# Altium PCB ESP32-C3_ETH01.PcbDoc (part 1 of 2)
Units mm, origin at the board's own origin, x right, y up, seen from the top; angles counter-clockwise.
Board outline 55 x 26 mm, 2 copper layers (Top Layer, Bottom Layer); 54 components, 52 nets, 217 pads, 131 vias.
Unrouted connection lines stored in the file: 1.
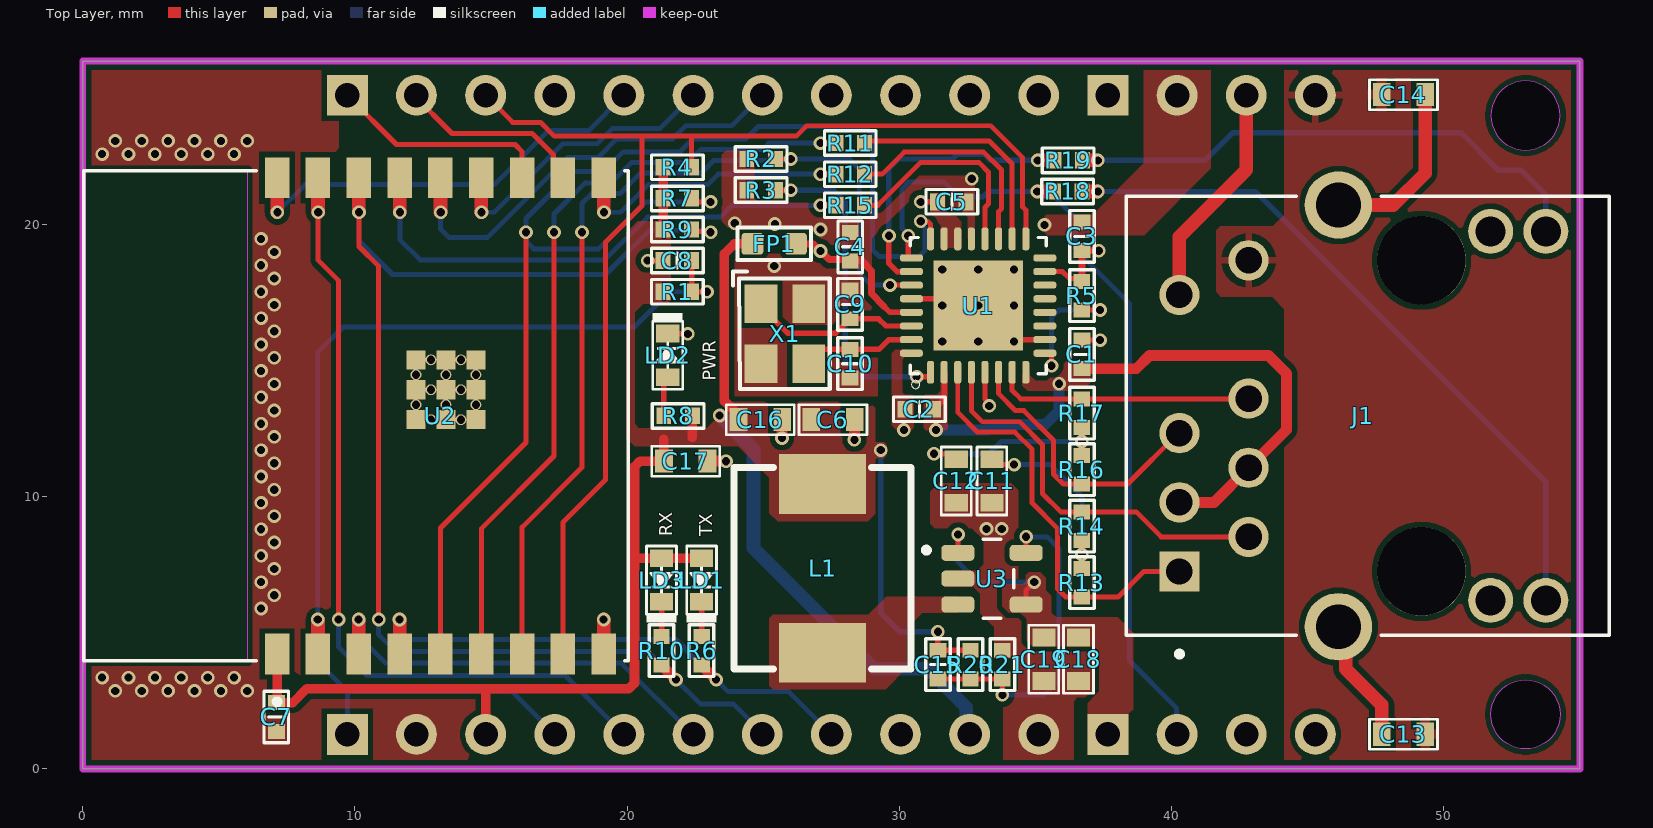
[diagram p0: Top Layer view]
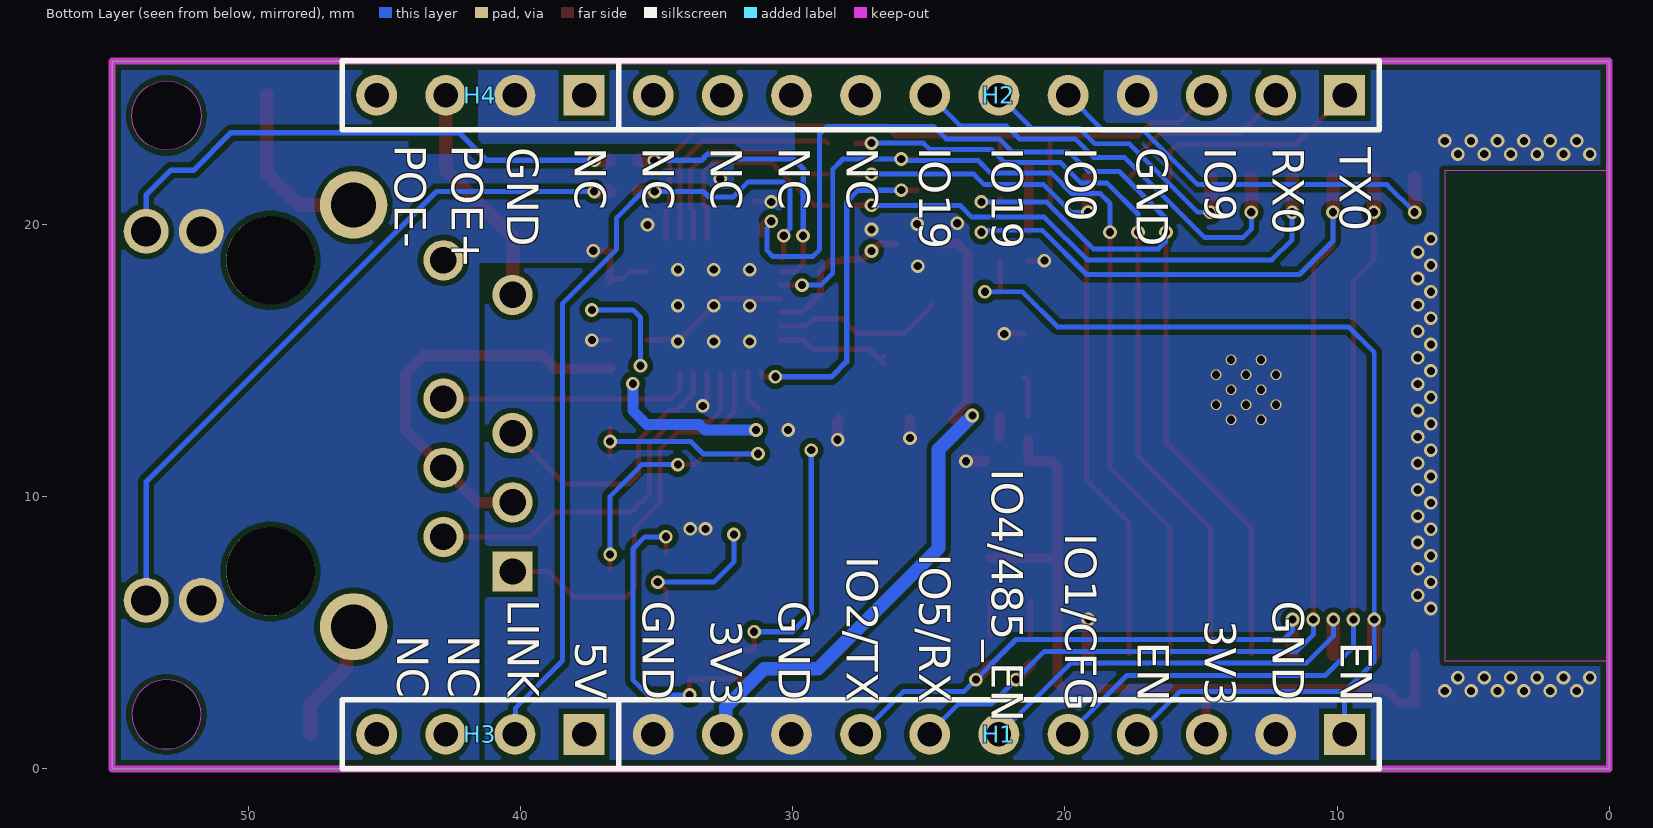
[diagram p1: Bottom Layer view, seen from below]
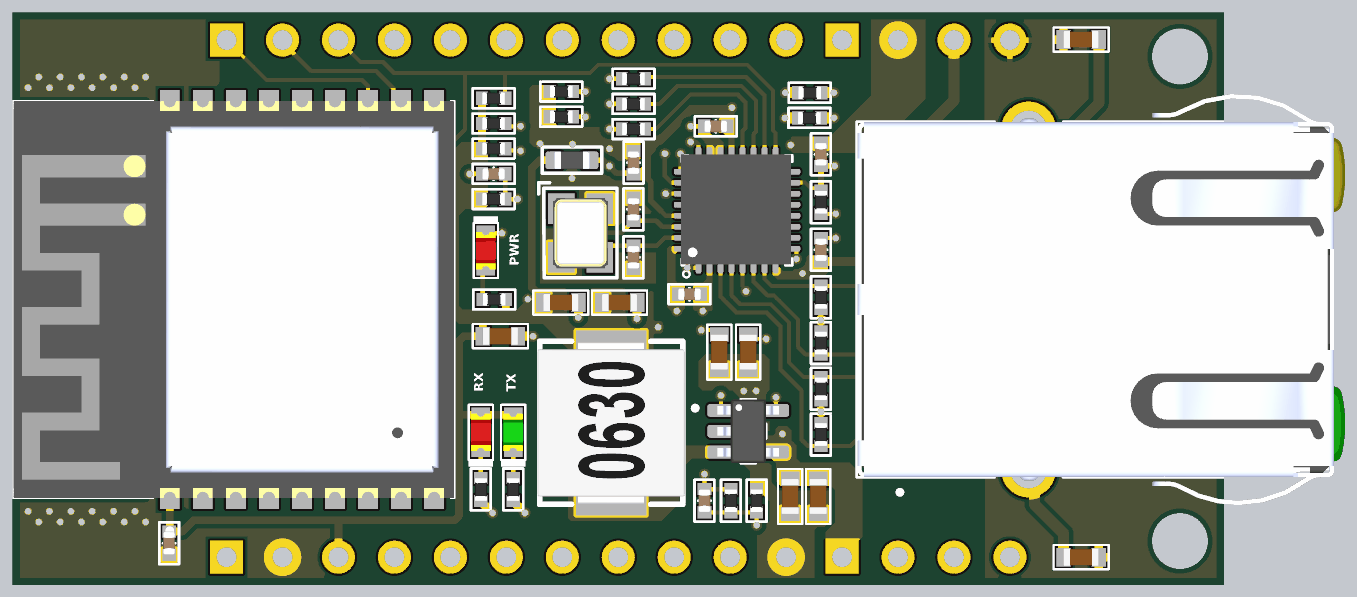
[diagram p2: 3D render of the assembled board from above, using the file's embedded part models]

## Layer stack, top to bottom
Top Solder: solder mask 0.0102, Solder Resist, Dk 3.5
Top Layer: signal copper 0.0356
Dielectric 1: dielectric 0.32, FR-4, Dk 4.8
Bottom Layer: signal copper 0.0356
Bottom Solder: solder mask 0.0102, Solder Resist, Dk 3.5

## Board outline
0,0 0,26 55,26 55,0
cut-out: 51.73,24 ccw(c53,24) 53,22.73 ccw(c53,24) 54.27,24 ccw(c53,24) 53,25.27 ccw(c53,24)
cut-out: 51.73,2 cw(c53,2) 53,3.27 cw(c53,2) 54.27,2 cw(c53,2) 53,0.73 cw(c53,2)

## Design rules (kind name [scope] priority, off if disabled: settings)
Clearance [All] p1: gap=0.2 ignorepadtopadclearanceinfootprint=FALSE
PolygonConnect PWR [InNetClass('PWR')] p1: connectstyle=Direct reliefconductorwidth=0.254 reliefentries=4 polygonreliefangle="90 Angle" airgapwidth=0.254
PolygonConnect [All] p2: thpad.connectstyle=Relief thpad.reliefconductorwidth=0.254 thpad.reliefentries=4 thpad.polygonreliefangle="90 Angle" thpad.airgapwidth=0.254 smdpad.connectstyle=Relief smdpad.reliefconductorwidth=0.381 smdpad.reliefentries=4 smdpad.polygonreliefangle="90 Angle" smdpad.airgapwidth=0.18 via.connectstyle=Direct via.reliefconductorwidth=0.254 via.reliefentries=4 via.polygonreliefangle="90 Angle" via.airgapwidth=0.254
RoutingVias [All] p1: holewidth=0.711 width=1.27 viastyle="Through Hole" minholewidth=0.711 minwidth=1.27 maxholewidth=0.711 maxwidth=1.27
SolderMaskExpansion [All] p1: expansion=0.102 istentingtop=FALSE
Width [All] p1: maxlimit=1 minlimit=0.18 preferedwidth=0.254
30 further rules are at their usual default settings.

## Classes and differential pairs
net class PWR: 1.8V +3V3 +5 ETH_PWR GND NetL1_1

## Components (designator, comment, footprint, x,y, rotation, side; value= is the part's Value field where it differs from the comment)
C1 "0.1uF 100V" CAP0402 36.703,15.223 r180 top
C2 "0.1uF 100V" CAP0402 30.734,13.208 r270 top
C3 "0.1uF 100V" CAP0402 36.703,19.558 r180 top
C4 "0.1uF 100V" CAP0402 28.194,19.177 r180 top
C5 "0.1uF 100V" CAP0402 31.928,20.828 r270 top
C6 "22uF-0603" CAP0603 27.559,12.827 r0 top value=10uF
C7 "0.1uF 04020" CAP0402 7.112,1.905 r0 top
C8 "1uF 0402" CAP0402 21.844,18.669 r270 top
C9 "C0402C100K5GACTU" CAP0402 28.19,17.059 r0 top
C10 "C0402C100K5GACTU" CAP0402 28.19,14.883 r180 top
C11 "1nF-0603" CAP0603 33.397,10.574 r270 top
C12 "1nF-0603" CAP0603 32.089,10.574 r270 top
C13 "1nF-0603" CAP0603 48.514,1.27 r0 top
C14 "1nF-0603" CAP0603 48.514,24.765 r180 top
C15 "20pF 0402" CAP0402 31.414,3.831 r0 top
C16 "22uF-0603" CAP0603 24.892,12.827 r0 top value=10uF
C17 "22uF-0603" CAP0603 22.149,11.303 r0 top value=10uF
C18 "10uF-0603" CAP0603 36.576,4.026 r270 top value=10uF
C19 "10uF-0603" CAP0603 35.306,4.026 r270 top value=10uF
FP1 "120R-100M" FP0603 25.4,19.685 r270 top
H1 "Header 11" HDR1X11 9.72,1.268 r0 bottom
H2 "Header 11" HDR1X11 9.72,24.742 r0 bottom
H3 "Header 4" HDR1X4 37.66,1.268 r0 bottom
H4 "Header 4" HDR1X4 37.66,24.742 r0 bottom
J1 "1-2250024-1" BEL_1-2250024-1 49.176,12.965 r90 top
L1 "2.2uH" "Cuon cam - 06030 - 7*7*3" 27.178,7.366 r180 top
LD1 "LED-GREEN" LED_SMD0603_GREEN 22.733,6.934 r270 top
LD2 "LED-RED" LED_SMD0603_RED 21.488,15.189 r90 top
LD3 "LED-RED" LED_SMD0603_RED 21.263,6.934 r270 top
R1 "RC0402FR-1310KL" RES0402 21.844,17.526 r270 top
R2 "10K-0402 ±1%" RES0402 24.917,22.403 r90 top
R3 "RC0402JR-076K8L" RES0402 24.917,21.26 r270 top
R4 "RC0402JR-0720KL" RES0402 21.844,22.098 r270 top
R5 "RC0402FR-1310KL" RES0402 36.703,17.382 r0 top
R6 "RC0402JR-071KL" RES0402 22.733,4.343 r0 top
R7 "RC0402JR-0720KL" RES0402 21.844,20.955 r270 top
R8 "RC0402JR-071KL" RES0402 21.868,12.965 r270 top
R9 "RC0402JR-0720KL" RES0402 21.844,19.812 r270 top
R10 "RC0402JR-071KL" RES0402 21.263,4.343 r0 top
R11 "RC0402JR-0722RL" RES0402 28.194,22.987 r90 top
R12 "RC0402JR-0722RL" RES0402 28.194,21.844 r90 top
R13 "RC0402JR-0762RL" RES0402 36.703,6.837 r180 top
R14 "RC0402JR-0762RL" RES0402 36.703,8.913 r180 top
R15 "RC0402JR-0722RL" RES0402 28.194,20.701 r90 top
R16 "RC0402JR-0762RL" RES0402 36.703,10.988 r180 top
R17 "RC0402JR-0762RL" RES0402 36.703,13.064 r180 top
R18 "RC0402JR-07330RL" RES0402 36.178,21.209 r90 top
R19 "RC0402JR-07330RL" RES0402 36.195,22.352 r90 top
R20 "RC0402JR-07100KL" RES0402 32.612,3.831 r180 top
R21 "RC0402JR-0720KL" RES0402 33.782,3.831 r0 top
U1 "DM9051" QFN50P500X500X100-33N 32.893,17.018 r90 top
U2 "ESP32-C3-WROOM-02-H4" MODULE_ESP32-C3-WROOM-02-H4 10.042,12.965 r90 top locked
U3 "ETA3417" SOT95P280X145-5N 33.401,6.985 r0 top
X1 "-" OSC-SMD_4P-L3.2-W2.5-BL 25.791,15.983 r270 top

## Footprints (in the part's own frame and the unit in brackets; to place one, negate y for a bottom-side part, rotate by r counter-clockwise, add the part's x,y. Pads: shape width x height; smd on the part's side, far side on the other; paste and mask are expansions set on the pad)
BEL_1-2250024-1 [mm]
  rect 1.478x1.478 hole 0.97: 1(-5.715,8.89)
  round 1.478 hole 0.97: 2(-4.445,6.35) 3(-3.175,8.89) 4(-1.905,6.35) 5(-0.635,8.89) 6(0.635,6.35) 9(4.445,8.89) 10(5.715,6.35)
  round 1.65 hole 1.1: 11(-6.78,-2.54) 12(-6.78,-4.57) 13(6.78,-2.54) 14(6.78,-4.57)
  round 2.475 hole 1.65: S1(-7.745,3.05) S2(7.745,3.05)
  round 3.25 hole 3.25 unplated: ""(-5.715,0) ""(5.715,0)
  silkscreen extent -8.85,-6.9 8.07,10.85, body extent -9.34,-11.33 9.33,10.82, height 15.34
CAP0402 [mm]
  rect 0.62x0.55 smd: 1(0,0.525) 2(0,-0.525)
  silkscreen extent -0.45,-0.95 0.45,0.95, body extent -0.27,-0.53 0.28,0.52, height 0.55
CAP0603 [mm]
  rect 0.65x0.85 smd: 1(-0.8,0) 2(0.8,0)
  silkscreen extent -1.25,-0.55 1.25,0.55, body extent -0.8,-0.4 0.8,0.4, height 0.79
"Cuon cam - 06030 - 7*7*3" [mm]
  rect 3.2x2.2 smd: 1(0,3.1) 2(0,-3.1)
  silkscreen extent -3.25,-3.7 3.25,3.7, body extent -3.35,-3.65 3.35,3.65, height 2.81
FP0603 [mm]
  rrect30% 0.8x0.8 smd: 1(0.4,0.8) 2(0.4,-0.8)
  silkscreen extent -0.2,-1.35 0.99,1.35, body extent 0,-0.8 0.8,0.8, height 0.8
HDR1X4 [mm] "Connector; Header; 4 Position"
  rect 1.5x1.5 hole 0.9: 1(0,0)
  round 1.5 hole 0.9: 2(2.54,0) 3(5.08,0) 4(7.62,0)
  silkscreen extent -1.27,-1.27 8.89,1.27, body extent -1.27,-1.27 8.89,1.27, height 7
HDR1X11 [mm] "Connector; Header; 11 Position"
  rect 1.5x1.5 hole 0.9: 1(0,0)
  round 1.5 hole 0.9: 2(2.54,0) 3(5.08,0) 4(7.62,0) 5(10.16,0) 6(12.7,0) 7(15.24,0) 8(17.78,0) 9(20.32,0) 10(22.86,0) 11(25.4,0)
  silkscreen extent -1.27,-1.27 26.67,1.27, body extent -1.27,-1.27 26.67,1.27, height 7
LED_SMD0603_GREEN [mm]
  rect 0.65x0.85 smd: 1(-0.8,0) 2(0.8,0)
  silkscreen extent -1.25,-0.55 1.55,0.55, body extent -0.85,-0.45 0.85,0.45, height 0.9
LED_SMD0603_RED [mm]
  rect 0.65x0.85 smd: 1(-0.8,0) 2(0.8,0)
  silkscreen extent -1.25,-0.55 1.55,0.55, body extent -0.86,-0.45 0.85,0.45, height 0.9
MODULE_ESP32-C3-WROOM-02-H4 [mm]
  rect 1.5x0.9 smd: 1(-8.75,2.9) 2(-8.75,1.4) 3(-8.75,-0.1) 4(-8.75,-1.6) 5(-8.75,-3.1) 6(-8.75,-4.6) 7(-8.75,-6.1) 8(-8.75,-7.6) 9(-8.75,-9.1) 10(8.75,-9.1) 11(8.75,-7.6) 12(8.75,-6.1) 13(8.75,-4.6) 14(8.75,-3.1) 15(8.75,-1.6) 16(8.75,-0.1) 17(8.75,1.4) 18(8.75,2.9)
  rect 0.7x0.7 smd: 19(-0.14,-2.2) 20(0.96,-2.2) 21(2.06,-2.2) 22(-0.14,-3.3) 23(0.96,-3.3) 24(2.06,-3.3) 25(-0.14,-4.4) 26(0.96,-4.4) 27(2.06,-4.4)
  round 0.4 hole 0.3 mask+0: 28(0.41,-2.2) 29(1.51,-2.2) 30(-0.14,-2.75) 31(0.96,-2.75) 32(2.06,-2.75) 33(0.41,-3.3) 34(1.51,-3.3) 35(-0.14,-3.85) 36(0.96,-3.85) 37(2.06,-3.85) 38(0.41,-4.4) 39(1.51,-4.4)
  Keep-Out Layer region: 9,4 -9,4 -9,10 9,10
  Keep-Out Layer region: 9,4 -9,4 -9,10 9,10
  silkscreen extent -10.6,-10 9,10, body extent -9,-10 9,10, height 3.35
OSC-SMD_4P-L3.2-W2.5-BL [mm]
  rect 1.4x1.2 smd: 1(-1.1,-0.875) 2(1.1,-0.875) 3(1.1,0.875) 4(-1.1,0.875)
  silkscreen extent -2.29,-1.9 2.03,1.65, body extent -1.6,-1.25 1.6,1.25, height 0.8
QFN50P500X500X100-33N [mm]
  rrect70% 0.84x0.26 smd: 1(-2.45,1.75) 2(-2.45,1.25) 3(-2.45,0.75) 4(-2.45,0.25) 5(-2.45,-0.25) 6(-2.45,-0.75) 7(-2.45,-1.25) 8(-2.45,-1.75) 17(2.45,-1.75) 18(2.45,-1.25) 19(2.45,-0.75) 20(2.45,-0.25) 21(2.45,0.25) 22(2.45,0.75) 23(2.45,1.25) 24(2.45,1.75)
  rrect70% 0.26x0.84 smd: 9(-1.75,-2.45) 10(-1.25,-2.45) 11(-0.75,-2.45) 12(-0.25,-2.45) 13(0.25,-2.45) 14(0.75,-2.45) 15(1.25,-2.45) 16(1.75,-2.45) 25(1.75,2.45) 26(1.25,2.45) 27(0.75,2.45) 28(0.25,2.45) 29(-0.25,2.45) 30(-0.75,2.45) 31(-1.25,2.45) 32(-1.75,2.45)
  rect 3.3x3.3 smd paste-3: 33(0,0)
  silkscreen extent -3.05,-2.5 2.5,2.5, body extent -2.46,-2.46 2.54,2.54, height 1
RES0402 [mm]
  rect 0.6x0.55 smd: 1(0,0.525) 2(0,-0.525)
  silkscreen extent -0.45,-0.95 0.45,0.95, body extent -0.27,-0.52 0.28,0.53, height 0.4
SOT95P280X145-5N [mm]
  rrect50% 1.21x0.59 smd: 1(-1.255,0.95) 2(-1.255,0) 3(-1.255,-0.95) 4(1.255,-0.95) 5(1.255,0.95)
  silkscreen extent -2.51,-1.45 0.8,1.45, body extent -1.4,-1.45 1.4,1.45, height 1.45

## Part data
C1 C2 C3 C4 C5 C7: library part CC0402KRX7R8BB104, "Multilayer Ceramic Capacitor, 0.1 uF, 50 V, ï¿½ 10%, X7R, 0402 [1005 Metric]", Capacitance=100nF, Case Code (Imperial)=0402, Case Code (Metric)=1005, Dielectric=X7R, Manufacturer=Yageo, Max Operating Temperature=125°C, Min Operating Temperature=-55°C, Temperature Coefficient=30ppm/°C, Tolerance=10%, Voltage Rating=25V, Case/Package=0402, Category="Ceramic Capacitors", Construction=Flat, Dissipation Factor=3.5%, Halogen Free=5694HalogenFree, Height=0.5mm, Lead Free=5697LeadFree, Length=1mm, Manufacturer Part Number=CC0402KRX7R8BB104, Material=4241ConductorMaterial, Mount="Surface Mount", Packaging="Tape and Reel", Pricing 1="10000=0.0031, 40000=0.003, 150000=0.0028, 300000=0.0027, 400000=0.0027, 750000=0.0026, 1000000=0.0026 (USD)", RoHS=Yes, RoHS Compliant=Yes, Series=CC, Stock 1=28110000, Supplier 1="Future Electronics", Termination=SMD/SMT, Thickness=0.022inch, Voltage Rating (DC)=25V, Width=0.02inch
C6 C16 C17: library part CC0603KRX5R6BB106, "CAP CER 22UF 10V X5R 0603", Capacitance=10µF, Manufacturer 1=Yageo, Operating Temperature="-55°C ~ 85°C", Package / Case="0603 (1608 Metric)", Ratings=-, Supplier Part Number 1=311-1782-1-ND, Temperature Coefficient=X5R, Tolerance=±10%, Voltage - Rated=10V, Applications="General Purpose", Category 1=Capacitors, ComponentLink1Description=http://www.yageo.com/documents/recent/UPY-GPHC_X5R_4V-to-50V_24.pdf, ComponentLink1URL=http://www.yageo.com/documents/recent/UPY-GPHC_X5R_4V-to-50V_24.pdf, Description 1="CAP CER 10UF 10V X5R 0603", Failure Rate=-, Features=-, Height - Seated (Max)=-, Lead Spacing=-, Lead Style=-, Manufacturer Part Number 1=CC0603KRX5R6BB106, Mounting Type="Surface Mount, MLCC", Packaging="Cut Tape (CT)", Part Status=Active, Pricing 1="1=0.33, 10=0.225, 100=0.1272, 500=0.08982, 1000=0.07858 (USD)", RoHS 1="RoHS Compliant", Size / Dimension="0.063\" L x 0.031\" W (1.60mm x 0.80mm)", Stock 1=66566, Supplier 1=Digi-Key, Thickness (Max)="0.035\" (0.90mm)"
C8: library part CC0402KRX5R5BB105, "Multilayer Ceramic Capacitor, 1 uF, 100 V, ï¿½ 10%, X7R, 0402 [1005 Metric]", Capacitance=1uF, Case Code (Imperial)=0402, Case Code (Metric)=1005, Dielectric=X5R, Dielectric Material=4241ConductorMaterial, Manufacturer=Yageo, Max Operating Temperature=85°C, Min Operating Temperature=-55°C, Temperature Coefficient=30ppm/°C, Tolerance=10%, Voltage Rating=6.3V, Case/Package=0402, Category="Ceramic Capacitors", Depth=0.5mm, Halogen Free=5694HalogenFree, Height=0.5mm, Lead Free=5697LeadFree, Length=1mm, Manufacturer Part Number=CC0402KRX5R5BB105, Material=4241ConductorMaterial, Mount="Surface Mount", Number of Pins=2, Packaging="Tape and Reel", Pricing 1="10000=0.0079, 30000=0.0077, 50000=0.0076, 150000=0.0074, 250000=0.0072 (USD)", Radiation Hardening=No, Reach SVHC Compliant=No, RoHS=Yes, RoHS Compliant=Yes, Series=CC, Stock 1=12090000, Supplier 1="Future Electronics", Termination=SMD/SMT, Voltage Rating (AC)=6.3V, Voltage Rating (DC)=6.3V, Width=0.5mm
C9 C10: "Multilayer Ceramic Capacitor, 10 pF, 50 V, ï¿½ 10%, C0G (NP0), 0402 [1005 Metric]", Capacitance=10pF, Case Code (Imperial)=0402, Case Code (Metric)=1005, Dielectric=C0G, Dielectric Material=4241ConductorMaterial, Manufacturer=KEMET, Max Operating Temperature=125°C, Min Operating Temperature=-55°C, Package Quantity=1, Tolerance=10%, Voltage Rating=50V, Case/Package=0402, Category="Ceramic Capacitors", Construction=Flat, Depth=0.5mm, Dissipation Factor=0.1%, Height=0.5mm, Lead Free=5697LeadFree, Lead Pitch=0.3mm, Length=1mm, Manufacturer Part Number=C0402C100K5GACTU, Material=4241ConductorMaterial, Mount="Surface Mount", Number of Pins=2NUMBER, Packaging="Tape and Reel", Pricing 1="1=0.1, 10=0.008, 50=0.008, 100=0.005, 1000=0.004, 10000=0.003 (USD)", Radiation Hardening=No, Reach SVHC Compliant=No, RoHS=Yes, RoHS Compliant=Yes, Series=C, Stock 1=56137, Supplier 1=Mouser, Termination=SMD/SMT, Thickness=0.022inch, Voltage Rating (DC)=50V, Width=0.02inch
C11 C12 C13 C14: library part CC0603KRX7R9BB102, "CAP CER 1000PF 50V X7R 0603", Manufacturer=Yageo, Operating Temperature="-55°C ~ 125°C", Package / Case="0603 (1608 Metric)", Ratings=-, Supplier Part Number 1=311-1080-1-ND, Temperature Coefficient=X7R, Tolerance=±10%, Voltage - Rated=50V, Applications="General Purpose", Category=Capacitors, ComponentLink1Description=http://www.yageo.com/documents/recent/UPY-GPHC_X7R_6.3V-to-50V_18.pdf, ComponentLink1URL=http://www.yageo.com/documents/recent/UPY-GPHC_X7R_6.3V-to-50V_18.pdf, Failure Rate=-, Features=-, Height - Seated (Max)=-, Lead Spacing=-, Lead Style=-, Manufacturer Part Number=CC0603KRX7R9BB102, Mounting Type="Surface Mount, MLCC", Notification="Current market demand for these product types have resulted in fluctuating and extending lead times. Lead times may differ.", Packaging="Cut Tape (CT)", Part Status=Active, Pricing 1="1=0.1, 10=0.028, 100=0.0126, 500=0.009, 1000=0.00708 (USD)", RoHS="RoHS Compliant", Size / Dimension="0.063\" L x 0.032\" W (1.60mm x 0.80mm)", Stock 1=0, Supplier 1=Digi-Key, Thickness (Max)="0.035\" (0.90mm)"
C15: library part C0402C100K5GACTU, "Multilayer Ceramic Capacitor, 10 pF, 50 V, ï¿½ 10%, C0G (NP0), 0402 [1005 Metric]", Capacitance=10pF, Case Code (Imperial)=0402, Case Code (Metric)=1005, Dielectric=C0G, Dielectric Material=4241ConductorMaterial, Manufacturer=KEMET, Max Operating Temperature=125°C, Min Operating Temperature=-55°C, Package Quantity=1, Tolerance=10%, Voltage Rating=50V, Case/Package=0402, Category="Ceramic Capacitors", Construction=Flat, Depth=0.5mm, Dissipation Factor=0.1%, Height=0.5mm, Lead Free=5697LeadFree, Lead Pitch=0.3mm, Length=1mm, Manufacturer Part Number=C0402C100K5GACTU, Material=4241ConductorMaterial, Mount="Surface Mount", Number of Pins=2NUMBER, Packaging="Tape and Reel", Pricing 1="1=0.1, 10=0.008, 50=0.008, 100=0.005, 1000=0.004, 10000=0.003 (USD)", Radiation Hardening=No, Reach SVHC Compliant=No, RoHS=Yes, RoHS Compliant=Yes, Series=C, Stock 1=56137, Supplier 1=Mouser, Termination=SMD/SMT, Thickness=0.022inch, Voltage Rating (DC)=50V, Width=0.02inch
C18 C19: library part CC0603KRX5R6BB106, "CAP CER 10UF 10V X5R 0603", Capacitance=10µF, Manufacturer 1=Yageo, Operating Temperature="-55°C ~ 85°C", Package / Case="0603 (1608 Metric)", Ratings=-, Supplier Part Number 1=311-1782-1-ND, Temperature Coefficient=X5R, Tolerance=±10%, Voltage - Rated=10V, Applications="General Purpose", Category 1=Capacitors, ComponentLink1Description=http://www.yageo.com/documents/recent/UPY-GPHC_X5R_4V-to-50V_24.pdf, ComponentLink1URL=http://www.yageo.com/documents/recent/UPY-GPHC_X5R_4V-to-50V_24.pdf, Description 1="CAP CER 10UF 10V X5R 0603", Failure Rate=-, Features=-, Height - Seated (Max)=-, Lead Spacing=-, Lead Style=-, Manufacturer Part Number 1=CC0603KRX5R6BB106, Mounting Type="Surface Mount, MLCC", Packaging="Cut Tape (CT)", Part Status=Active, Pricing 1="1=0.33, 10=0.225, 100=0.1272, 500=0.08982, 1000=0.07858 (USD)", RoHS 1="RoHS Compliant", Size / Dimension="0.063\" L x 0.031\" W (1.60mm x 0.80mm)", Stock 1=66566, Supplier 1=Digi-Key, Thickness (Max)="0.035\" (0.90mm)"
FP1: library part "FERRITE BREAD", "MAF1608FAD121CT000", ComponentLink1Description=https://www.mouser.vn/ProductDetail/TDK/MAF1608FAD121CT000?qs=s6nfgz3miVyig30k%2FQ1Tzw%3D%3D
J1: "1 Port RJ45 Magjack Connector Through Hole 10/100 Base-T, AutoMDIX, Power over Ethernet (PoE)", Package=None, Availability=Warning, DigiKey-Purchase-URL=https://snapeda.com/shop?store=DigiKey&id=3605456, MF="TRP Connector", Mouser-Purchase-URL=https://snapeda.com/shop?store=Mouser&id=3605456, MP=1-2250024-1, Price=None, SnapEDA_Link=https://www.snapeda.com/parts/1-2250024-1/TRP%20Connector%20B.V./view-part/3605456/?ref=snap
L1: library part "Fixed Inductors", "Wire-wound SMD Inductor 0630-2R2 2.2uH 7A", Package=Package, Check_prices=https://www.snapeda.com/parts/ASPI-0425-1R0N-T3%20(3K/REEL)/Abracon+LLC/view-part/?ref=eda, MF="Abracon LLC", MP="ASPI-0425-1R0N-T3 (3K/REEL)", SnapEDA_Link=https://www.snapeda.com/parts/ASPI-0425-1R0N-T3%20(3K/REEL)/Abracon+LLC/view-part/?ref=snap
LD1: library part LED_LTST-C191KGKT, "LED GREEN CLEAR 0603 SMD", Color=Green, Current - Test=20mA, Lens Color=Colorless, Manufacturer 1="Lite-On Inc.", Manufacturer Part Number 1=LTST-C191KGKT, Millicandela Rating=35mcd, Package / Case="0603 (1608 Metric)", Supplier Part Number 1=160-1446-1-ND, Voltage - Forward (Vf) (Typ)=2V, Category 1=Optoelectronics, ComponentLink1Description=http://optoelectronics.liteon.com/upload/download/DS22-2000-228/S_110_LTST-C191KGKT.pdf, ComponentLink1URL=http://optoelectronics.liteon.com/upload/download/DS22-2000-228/S_110_LTST-C191KGKT.pdf, Description 1="LED GREEN CLEAR 0603 SMD", Features=-, Height (Max)=0.55mm, Lens Style/Size="Rectangle with Flat Top, 1.10mm x 0.80mm", Lens Transparency=Clear, Mounting Type="Surface Mount", Packaging="Cut Tape (CT)", Part Status=Active, Pricing 1="1=0.29, 10=0.211, 25=0.1556, 100=0.1111, 250=0.07556, 500=0.06666, 1000=0.05222, 2500=0.05111 (USD)", RoHS 1="RoHS Compliant", Size / Dimension="1.60mm L x 0.80mm W", Stock 1=1325167, Supplier 1=Digi-Key, Viewing Angle=130°, Wavelength - Dominant=571nm, Wavelength - Peak=574nm
LD2 LD3: library part LED_LTST-C191KRKT, "LED RED CLEAR 0603 SMD", Color=Red, Current - Test=20mA, Lens Color=Colorless, Manufacturer="Lite-On Inc.", Manufacturer Part Number=LTST-C191KRKT, Millicandela Rating=54mcd, Package / Case="0603 (1608 Metric)", Supplier Part Number 1=160-1447-6-ND, Voltage - Forward (Vf) (Typ)=2V, Category=Optoelectronics, ComponentLink1Description=http://optoelectronics.liteon.com/upload/download/DS22-2000-223/LTST-C191KRKT.PDF, ComponentLink1URL=http://optoelectronics.liteon.com/upload/download/DS22-2000-223/LTST-C191KRKT.PDF, Features=-, Height (Max)=0.65mm, Lens Style/Size="Rectangle with Flat Top, 1.10mm x 0.80mm", Lens Transparency=Clear, Mounting Type="Surface Mount", Packaging=Digi-Reel®, Part Status=Active, Pricing 1="1=0.29, 10=0.211, 25=0.1556, 100=0.1111, 250=0.07556, 500=0.06666, 1000=0.05222, 2500=0.05111 (USD)", RoHS="RoHS Compliant", Size / Dimension="1.60mm L x 0.80mm W", Stock 1=711347, Supplier 1=Digi-Key, Viewing Angle=130°, Wavelength - Dominant=631nm, Wavelength - Peak=639nm
R1 R5: "SMD Chip Resistor, 10 kOhm, ï¿½ 1%, 63 mW, 0402 [1005 Metric], Thick Film, General Purpose", Case Code (Imperial)=0402, Case Code (Metric)=1005, Manufacturer=Yageo, Max Operating Temperature=155°C, Min Operating Temperature=-55°C, Power Rating=62.5mW, Resistance=10kR, Resistance Tolerance=1%, Resistor Type="Thick Film", Supplier Part Number 1=2023432, Temperature Coefficient=100ppm/°C, Voltage Rating=50V, Case/Package=0402, Category="Chip SMD Resistors", Construction=Rectangular, Contact Plating=Tin,Lead, Depth=0.5mm, Lead Free=5697LeadFree, Length=1mm, Manufacturer Part Number=RC0402FR-1310KL, Military Standard=Not, Number of Pins=2NUMBER, Number of Terminations=2, Packaging="Tape and Reel", Pricing 1="50000=0.0008, 200000=0.0007, 500000=0.0007, 750000=0.0007, 1250000=0.0007, 2000000=0.0007, 5000000=0.0006 (USD)", Reach SVHC Compliant=No, RoHS=Yes, RoHS Compliant=Yes, Series=RC, Stock 1=4200000, Supplier 1="Future Electronics", Technology="THICK FILM", Termination=SMD/SMT, Tolerance=1%, Voltage Rating (DC)=50V, Working Voltage=50V
R2: library part RC0402FR-1310KL, "SMD Chip Resistor, 10 kOhm, ï¿½ 1%, 63 mW, 0402 [1005 Metric], Thick Film, General Purpose", Case Code (Imperial)=0402, Case Code (Metric)=1005, Manufacturer=Yageo, Max Operating Temperature=155°C, Min Operating Temperature=-55°C, Power Rating=62.5mW, Resistance=10kR, Resistance Tolerance=1%, Resistor Type="Thick Film", Supplier Part Number 1=2023432, Temperature Coefficient=100ppm/°C, Voltage Rating=50V, Case/Package=0402, Category="Chip SMD Resistors", Construction=Rectangular, Contact Plating=Tin,Lead, Depth=0.5mm, Lead Free=5697LeadFree, Length=1mm, Manufacturer Part Number=RC0402FR-1310KL, Military Standard=Not, Number of Pins=2NUMBER, Number of Terminations=2, Packaging="Tape and Reel", Pricing 1="50000=0.0008, 200000=0.0007, 500000=0.0007, 750000=0.0007, 1250000=0.0007, 2000000=0.0007, 5000000=0.0006 (USD)", Reach SVHC Compliant=No, RoHS=Yes, RoHS Compliant=Yes, Series=RC, Stock 1=4200000, Supplier 1="Future Electronics", Technology="THICK FILM", Termination=SMD/SMT, Tolerance=1%, Voltage Rating (DC)=50V, Working Voltage=50V
R3: "Res Thick Film 0402 6.8K Ohm 5% 0.063W(1/16W) ±100ppm/C Pad SMD T/R", Manufacturer=Yageo, Category="Chip SMD Resistors", ComponentLink1Description=https://datasheet.ciiva.com/22643/1018594-22643413.pdf?src-supplier=Element14, ComponentLink1URL=https://datasheet.ciiva.com/22643/1018594-22643413.pdf?src-supplier=Element14, ComponentLink2Description=https://datasheet.ciiva.com/6067/1018594-6067880.pdf?src-supplier=Farnell, ComponentLink2URL=https://datasheet.ciiva.com/6067/1018594-6067880.pdf?src-supplier=Farnell, ComponentLink3Description=https://datasheet.ciiva.com/2452/pyu-r-int-thick-7-2452782.pdf?src-supplier=Digikey, ComponentLink3URL=https://datasheet.ciiva.com/2452/pyu-r-int-thick-7-2452782.pdf?src-supplier=Digikey, ComponentLink4Description=https://datasheet.ciiva.com/2452/pyu-r-int-thick-7-2452783.pdf?src-supplier=Digikey, ComponentLink4URL=https://datasheet.ciiva.com/2452/pyu-r-int-thick-7-2452783.pdf?src-supplier=Digikey, ComponentLink5Description=https://datasheet.ciiva.com/2452/pyu-r-int-thick-7-2452784.pdf?src-supplier=Digikey, ComponentLink5URL=https://datasheet.ciiva.com/2452/pyu-r-int-thick-7-2452784.pdf?src-supplier=Digikey, ComponentLink6Description=https://datasheet.ciiva.com/15189/getdatasheetpartid-326392-15189579.pdf?src-supplier=Verical, ComponentLink6URL=https://datasheet.ciiva.com/15189/getdatasheetpartid-326392-15189579.pdf?src-supplier=Verical, Manufacturer Part Number=RC0402JR-076K8L, Pricing 1="10000=0.0012, 100000=0.0012, 300000=0.0011, 750000=0.0011, 2000000=0.001 (USD)", RoHS=Yes, Stock 1=40000, Supplier 1="Future Electronics"
R4 R7 R9 R21: "SMD Chip Resistor, 20 kOhm, ± 5%, 63 mW, 0402 [1005 Metric], Thick Film, General Purpose", Manufacturer=Yageo, Voltage Rating (DC)=50V, Category="Chip SMD Resistors", ComponentLink1Description=https://datasheet.ciiva.com/2518/pyu-r-int-thick-7-2518910.pdf?src-supplier=Digikey, ComponentLink1URL=https://datasheet.ciiva.com/2518/pyu-r-int-thick-7-2518910.pdf?src-supplier=Digikey, ComponentLink2Description=https://datasheet.ciiva.com/2518/pyu-r-int-thick-7-2518911.pdf?src-supplier=Digikey, ComponentLink2URL=https://datasheet.ciiva.com/2518/pyu-r-int-thick-7-2518911.pdf?src-supplier=Digikey, ComponentLink3Description=https://datasheet.ciiva.com/2518/pyu-r-int-thick-7-2518912.pdf?src-supplier=Digikey, ComponentLink3URL=https://datasheet.ciiva.com/2518/pyu-r-int-thick-7-2518912.pdf?src-supplier=Digikey, ComponentLink4Description=https://datasheet.ciiva.com/16742/pyu-rc0402-51-rohs-l-6-r-16742238.pdf?src-supplier=Future+Electronics, ComponentLink4URL=https://datasheet.ciiva.com/16742/pyu-rc0402-51-rohs-l-6-r-16742238.pdf?src-supplier=Future+Electronics, ComponentLink5Description=https://datasheet.ciiva.com/12656/pyu-rc0402-51-rohs-l-6-r-12656781.pdf?src-supplier=Mouser, ComponentLink5URL=https://datasheet.ciiva.com/12656/pyu-rc0402-51-rohs-l-6-r-12656781.pdf?src-supplier=Mouser, ComponentLink6Description=https://datasheet.ciiva.com/7983/1018594-7983564.pdf?src-supplier=Element14, ComponentLink6URL=https://datasheet.ciiva.com/7983/1018594-7983564.pdf?src-supplier=Element14, Lead Free=5697LeadFree, Manufacturer Part Number=RC0402JR-0720KL, Number of Pins=2NUMBER, Pricing 1="10000=0.0008, 100000=0.0007, 300000=0.0007, 750000=0.0007, 2000000=0.0006 (USD)", RoHS=Yes, Stock 1=510000, Supplier 1="Future Electronics"
R6 R8 R10: "SMD Chip Resistor, 1 kOhm, ± 5%, 63 mW, 0402 [1005 Metric], Thick Film, General Purpose", Case Code (Imperial)=0402, Case Code (Metric)=1005, Manufacturer=Yageo, Max Operating Temperature=155°C, Max Power Dissipation=63mW, Min Operating Temperature=-55°C, Package Quantity=1, Power Rating=62.5mW, Resistance=1kR, Resistance Tolerance=5%, Resistor Type="Thick Film", Temperature Coefficient=100ppm/°C, Voltage Rating=50V, Case/Package=0402, Category="Chip SMD Resistors", Features="Moisture Resistant", Height=0.016inch, Lead Free=5697LeadFree, Length=0.039inch, Manufacturer Part Number=RC0402JR-071KL, Number of Terminations=2, Packaging="Cut Tape", Pricing 1="10000=0.0012, 100000=0.0012, 300000=0.0011, 750000=0.0011, 2000000=0.001 (USD)", Reach SVHC Compliant=No, RoHS=Yes, RoHS Compliant=Yes, Series=RC, Size Code=0402, Stock 1=12410000, Supplier 1="Future Electronics", Termination=SMD/SMT, Tolerance=5%, Voltage Rating (AC)=50V, Width=0.02inch
R11 R12 R15: "SMD Chip Resistor, 22 Ohm, ï¿½ 5%, 63 mW, 0402 [1005 Metric], Thick Film, General Purpose", Manufacturer=Yageo, Voltage Rating (AC)=50V, Category="Chip SMD Resistors", ComponentLink1Description=https://datasheet.ciiva.com/12656/pyu-rc0402-51-rohs-l-6-r-12656926.pdf?src-supplier=Mouser, ComponentLink1URL=https://datasheet.ciiva.com/12656/pyu-rc0402-51-rohs-l-6-r-12656926.pdf?src-supplier=Mouser, ComponentLink2Description=https://datasheet.ciiva.com/46394/1018594-46394972.pdf?src-supplier=Element14, ComponentLink2URL=https://datasheet.ciiva.com/46394/1018594-46394972.pdf?src-supplier=Element14, ComponentLink3Description=https://datasheet.ciiva.com/7850/1018594-7850181.pdf?src-supplier=Element14, ComponentLink3URL=https://datasheet.ciiva.com/7850/1018594-7850181.pdf?src-supplier=Element14, ComponentLink4Description=https://datasheet.ciiva.com/2452/pyu-r-int-thick-7-2452770.pdf?src-supplier=Digikey, ComponentLink4URL=https://datasheet.ciiva.com/2452/pyu-r-int-thick-7-2452770.pdf?src-supplier=Digikey, ComponentLink5Description=https://datasheet.ciiva.com/2452/pyu-r-int-thick-7-2452771.pdf?src-supplier=Digikey, ComponentLink5URL=https://datasheet.ciiva.com/2452/pyu-r-int-thick-7-2452771.pdf?src-supplier=Digikey, ComponentLink6Description=https://datasheet.ciiva.com/2452/pyu-r-int-thick-7-2452772.pdf?src-supplier=Digikey, ComponentLink6URL=https://datasheet.ciiva.com/2452/pyu-r-int-thick-7-2452772.pdf?src-supplier=Digikey, Manufacturer Part Number=RC0402JR-0722RL, Pricing 1="10000=0.0015, 100000=0.0015, 300000=0.0014, 750000=0.0014, 2000000=0.0013 (USD)", RoHS=Yes, Stock 1=1770000, Supplier 1="Future Electronics"
R13 R14 R16 R17: "Res Thick Film 0402 62 Ohm 5% 1/16W ±100ppm/°C Molded SMD SMD Paper T/R", Manufacturer=Yageo, Category="Chip SMD Resistors", ComponentLink1Description=https://datasheet.ciiva.com/8888/pyu-rc0402-51-rohs-l-6-8888567.pdf?src-supplier=Avnet, ComponentLink1URL=https://datasheet.ciiva.com/8888/pyu-rc0402-51-rohs-l-6-8888567.pdf?src-supplier=Avnet, ComponentLink2Description=https://datasheet.ciiva.com/17071/pyu-rc0402-51-rohs-l-6-r-17071318.pdf?src-supplier=Future+Electronics, ComponentLink2URL=https://datasheet.ciiva.com/17071/pyu-rc0402-51-rohs-l-6-r-17071318.pdf?src-supplier=Future+Electronics, ComponentLink3Description=https://datasheet.ciiva.com/5561/pyu-rc0402-51-rohs-l-6-r-8721-5561853.pdf?src-supplier=Mouser, ComponentLink3URL=https://datasheet.ciiva.com/5561/pyu-rc0402-51-rohs-l-6-r-8721-5561853.pdf?src-supplier=Mouser, Manufacturer Part Number=RC0402JR-0762RL, Pricing 1="10000=0.001, 150000=0.0009, 400000=0.0009, 1000000=0.0009, 2500000=0.0008 (USD)", RoHS=Yes, Stock 1=90000, Supplier 1="Future Electronics"
R18 R19: "SMD Chip Resistor, 330 Ohm, ± 5%, 62.5 mW, 0402 [1005 Metric], Thick Film, General Purpose", Manufacturer=Yageo, Voltage Rating (AC)=50V, Category="Chip SMD Resistors", ComponentLink1Description=https://datasheet.ciiva.com/46394/1018594-46394967.pdf?src-supplier=Element14, ComponentLink1URL=https://datasheet.ciiva.com/46394/1018594-46394967.pdf?src-supplier=Element14, ComponentLink2Description=https://datasheet.ciiva.com/7983/1018594-7983577.pdf?src-supplier=Element14, ComponentLink2URL=https://datasheet.ciiva.com/7983/1018594-7983577.pdf?src-supplier=Element14, ComponentLink3Description=https://datasheet.ciiva.com/7850/1018594-7850197.pdf?src-supplier=Element14, ComponentLink3URL=https://datasheet.ciiva.com/7850/1018594-7850197.pdf?src-supplier=Element14, ComponentLink4Description=https://datasheet.ciiva.com/2452/pyu-r-int-thick-7-2452806.pdf?src-supplier=Digikey, ComponentLink4URL=https://datasheet.ciiva.com/2452/pyu-r-int-thick-7-2452806.pdf?src-supplier=Digikey, ComponentLink5Description=https://datasheet.ciiva.com/2452/pyu-r-int-thick-7-2452807.pdf?src-supplier=Digikey, ComponentLink5URL=https://datasheet.ciiva.com/2452/pyu-r-int-thick-7-2452807.pdf?src-supplier=Digikey, ComponentLink6Description=https://datasheet.ciiva.com/2452/pyu-r-int-thick-7-2452808.pdf?src-supplier=Digikey, ComponentLink6URL=https://datasheet.ciiva.com/2452/pyu-r-int-thick-7-2452808.pdf?src-supplier=Digikey, ComponentLink7Description=https://datasheet.ciiva.com/15189/getdatasheetpartid-327801-15189565.pdf?src-supplier=Verical, ComponentLink7URL=https://datasheet.ciiva.com/15189/getdatasheetpartid-327801-15189565.pdf?src-supplier=Verical, ComponentLink8Description=https://datasheet.ciiva.com/16992/pyu-rc0402-51-rohs-l-6-r-16992152.pdf?src-supplier=Future+Electronics, ComponentLink8URL=https://datasheet.ciiva.com/16992/pyu-rc0402-51-rohs-l-6-r-16992152.pdf?src-supplier=Future+Electronics, Lead Free=5697LeadFree, Manufacturer Part Number=RC0402JR-07330RL, Pricing 1="10000=0.0008, 100000=0.0007, 300000=0.0007, 750000=0.0007, 2000000=0.0006 (USD)", RoHS=Yes, Stock 1=220000, Supplier 1="Future Electronics"
R20: "SMD Chip Resistor, 100 kOhm, ± 5%, 62.5 mW, 0402 [1005 Metric], Thick Film, General Purpose", Case Code (Imperial)=0402, Case Code (Metric)=1005, Manufacturer=Yageo, Max Operating Temperature=155°C, Max Power Dissipation=63mW, Min Operating Temperature=-55°C, Power Rating=62.5mW, Resistance=100kR, Resistance Tolerance=5%, Resistor Type="Thick Film", Temperature Coefficient=100ppm/°C, Voltage Rating=50V, Case/Package=0402, Category="Chip SMD Resistors", Construction=Rectangular, Depth=0.5mm, Features="Moisture Resistant", Lead Free=5697LeadFree, Length=1mm, Manufacturer Part Number=RC0402JR-07100KL, Military Standard=Not, Number of Terminations=2, Packaging="Tape and Reel", Pricing 1="10000=0.0008, 100000=0.0008, 400000=0.0007, 1250000=0.0007, 4000000=0.0006 (USD)", Reach SVHC Compliant=Unknown, RoHS=Yes, RoHS Compliant=Yes, Series=RC, Size Code=0402, Stock 1=250000, Supplier 1="Future Electronics", Termination=SMD/SMT, Tolerance=5%, Voltage Rating (AC)=50V
U1: "SPI to Ethernet Controller - SQFN-32", Package=None, Availability=Unavailable, MP=LAN8740AI-EN-TR, Price=None
U2: "WiFi Modules (802.11) (Engineering Samples) SMD module, ESP32-C3, 4MB SPI flash, PCB antenna, -40 C +105 C", Package=Package, Availability="In Stock", Check_prices=https://www.snapeda.com/parts/ESP32-C3-WROOM-02-H4/Espressif+Systems/view-part/?ref=eda, MF="Espressif Systems", MP=ESP32-C3-WROOM-02-H4, Price=None, Purchase-URL=https://pricing.snapeda.com/search/part/ESP32-C3-WROOM-02-H4/?ref=eda, SnapEDA_Link=https://www.snapeda.com/parts/ESP32-C3-WROOM-02-H4/Espressif+Systems/view-part/?ref=snap
U3: "2.5A Continuous, 3A Peak, 3MHz Step-Down Converter in  / SOT23-5 Package", Package=None, Availability=Unavailable, MP=LP2985AIM5-2.8/NOPB, Price=None
X1: library part SX32Y025000BA1T, JLCPCB Part Class="Extended Part", LCSC Part Name="3225 25M 10PF  10ppm  -20 -75℃", Manufacturer=TKD(泰晶), Add into BOM=yes, Convert to PCB=yes, Crystal Type=-, Datasheet=https://atta.szlcsc.com/upload/public/pdf/source/20180829/C271631_9AC1C7FBF3C0341070E3D84891BB0616.pdf, Device=SX32Y025000BA1T, External load capacitor=-, Manufacturer Part=SX32Y025000BA1T, Operating Temperature=-, Supplier=LCSC, Supplier Footprint=SMD3225-4P, Supplier Part=C271631, Symbol=SX32Y025000BA1T

## Via types
v1: diameter 0.5, hole 0.3, Top Layer to Bottom Layer, tented both sides, 131 vias

## Nets (pads, with @x,y where several pads share a name; then routed paths per layer and width w, separated by ;. In a path a pad name is that pad's centre, name@x,y a point inside that pad or via, vN(x,y) a via of type N, cw(c..) or ccw(c..) an arc to the next point about the centre after c; other vN are vias at no path point)
1.8V: C1.1 C2.1 J1.3 J1.4 U1.2 U1.8 | length 22.5
  Top Layer w0.2: C2.1 31.259,13.243 31.434,13.418 31.469,13.418 31.643,13.592 U1.2
  Top Layer w0.4: C1.1 38.701,14.698 39.192,15.189 43.561,15.189 44.221,14.529 44.221,12.456 J1.4 41.556,9.79 J1.3
  Bottom Layer w0.4: v1(31.344,12.446) 33.223,12.446 33.426,12.649 35.357,12.649 35.865,13.157 v1(35.865,14.148)
+3V3: C6.1 C7.1 C15.1 C16.1 C17.1 FP1.2 H1.3 H1.10 L1.2 LD1.1 LD3.1 R1.2 R4.2 R7.2 R8.1 R9.2 R20.2 U2.1 | length 66.8
  Top Layer w0.2: v1(31.414,5.035) C15.1 R20.2
  Top Layer w0.35: U2.1 7.142,2.46 C7.1 7.713,2.43 8.23,2.946 14.8,2.946 ; H1.3 14.8,2.946 ; R9.2 R7.2 R4.2 ; 21.349,12.103 C17.1 20.474,11.303 20.269,11.098 20.269,7.679 ; 22.393,12.182 R8.1 ; LD1.1 LD3.1 20.324,7.734 20.269,7.679 ; C16.1 23.942,12.977 23.942,13.142 23.571,13.513 23.571,18.923 23.933,19.285 FP1.2 ; 14.8,2.946 20.064,2.946 20.269,3.151 20.269,7.679
  Bottom Layer w0.2: v1(29.312,11.709) 29.312,5.74 30.017,5.035 v1(31.414,5.035)
  Bottom Layer w0.5: v1(23.393,12.979) 24.638,11.735 24.638,8.103 29.058,3.683 31.039,3.683 32.456,2.265 32.456,1.391 H1.10
+5: C18.1 C19.1 H3.1 U3.1 U3.4 | length 5.7
  Top Layer w0.18: U3.1 32.156,7.945 v1(32.156,8.611) ; U3.4 34.656,6.564 v1(34.95,6.858)
  Bottom Layer w0.18: v1(32.156,8.611) 32.156,7.595 32.893,6.858 v1(34.95,6.858)
C3_IO0: H2.5 U2.18 | length 15.8
  Top Layer w0.5: U2.18 7.142,20.452 v1(7.149,20.445)
  Bottom Layer w0.18: v1(7.149,20.445) 8.167,21.463 15.113,21.463 17.094,23.444 18.582,23.444 H2.5
C3_IO1: H1.5 U2.17 | length 29.4
  Top Layer w0.18: v1(8.649,20.445) 8.649,18.681 9.398,17.932 v1(9.398,5.486)
  Top Layer w0.5: U2.17 8.642,20.452 v1(8.649,20.445)
  Bottom Layer w0.18: v1(9.398,5.486) 9.398,4.47 10.439,3.429 17.719,3.429 H1.5
C3_IO2: H1.7 R9.1 R10.2 U2.16 | length 49.4
  Top Layer w0.18: v1(10.149,20.445) 10.149,19.188 10.871,18.466 v1(10.871,5.486) ; R9.1 22.442,19.739 23.015,19.739 v1@23.063,19.787
  Top Layer w0.4: R10.2 21.288,3.818 21.363,3.743 21.363,3.707 v1(21.793,3.277)
  Top Layer w0.5: U2.16 10.142,20.452 v1(10.149,20.445)
  Bottom Layer w0.18: v1(10.149,20.445) 10.149,19.391 11.379,18.161 19.202,18.161 20.828,19.787 v1@23.063,19.787 ; v1(10.871,5.486) 10.871,4.928 11.481,4.318 20.752,4.318 v1(21.793,3.277) 22.682,2.388 23.901,2.388 24.96,1.329 H1.7
  other v1: 23.063,19.71
C3_IO3: R15.1 U2.15 | length 19.4
  Top Layer w0.2: v1(27.102,20.701) R15.1
  Top Layer w0.5: U2.15 11.642,20.452 v1(11.649,20.445)
  Bottom Layer w0.18: v1(11.649,20.445) 11.649,19.441 12.395,18.694 19.177,18.694 20.752,20.269 23.419,20.269 23.851,20.701 v1(27.102,20.701)
C3_IO4: H1.6 U2.3 | length 15.7
  Top Layer w0.5: v1(10.135,5.486) 10.142,5.479 U2.3
  Bottom Layer w0.18: v1(10.135,5.486) 10.135,4.877 11.125,3.886 19.787,3.886 22.405,1.268 H1.6
C3_IO5: H1.8 R6.2 U2.4 | length 19.9
  Top Layer w0.4: R6.2 22.758,3.818 22.833,3.743 22.833,3.71 v1(23.266,3.277)
  Top Layer w0.5: v1(11.635,5.486) 11.642,5.479 U2.4
  Bottom Layer w0.18: v1(11.635,5.486) 11.635,5.079 11.963,4.75 21.793,4.75 23.698,2.845 25.923,2.845 H1.8
C3_IO6: R7.1 U1.24 U2.5 | length 48.6
  Top Layer w0.18: U2.5 13.142,8.849 16.281,11.989 v1(16.281,19.71) ; R7.1 22.496,20.828 v1(23.063,20.828) ; v1(30.785,20.117) 31.035,20.117 31.14,20.011 U1.24@31.14,19.609
  Bottom Layer w0.18: v1(23.063,20.828) 20.68,20.828 18.952,19.101 16.561,19.101 16.304,19.358 16.304,19.688 v1(16.281,19.71) 16.281,20.218 18.009,21.946 19.126,21.946 19.837,22.657 21.92,22.657 22.403,23.139 24.359,23.139 24.816,23.597 28.727,23.597 29.007,23.317 29.007,19.069 29.255,18.821 30.724,18.821 30.937,19.034 30.937,19.878 30.785,20.03 v1(30.785,20.117)
C3_IO7: R11.1 U2.6 | length 28.7
  Top Layer w0.18: U2.6 14.642,8.825 17.31,11.493 v1(17.31,19.71)
  Top Layer w0.2: v1(27.102,22.987) R11.1
  Bottom Layer w0.18: v1(17.31,19.71) 17.31,20.383 18.44,21.514 19.403,21.514 20.165,22.276 22.225,22.276 22.708,22.758 24.968,22.758 25.197,22.987 v1(27.102,22.987)
C3_IO8: R2.2 U1.27 U2.7 | length 35
  Top Layer w0.18: U2.7 16.142,8.877 18.339,11.074 v1(18.339,19.71) ; v1(29.655,17.768) U1.27
  Top Layer w0.2: R2.2 v1(26.009,22.403)
  Bottom Layer w0.18: v1(18.339,19.71) 18.339,20.777 18.694,21.133 19.736,21.133 20.498,21.895 22.733,21.895 23.19,22.352 25.958,22.352 v1(26.009,22.403) 28.15,22.403 28.524,22.029 28.524,18.212 28.968,17.768 v1(29.655,17.768)
C3_IO9: H2.3 R4.1 U1.17 U2.8 | length 45.4
  Top Layer w0.18: H2.3 15.793,23.749 16.815,23.749 17.323,23.241 20.543,23.241 ; U2.8 17.642,9.057 19.202,10.617 19.202,19.351 20.543,20.692 20.543,23.241 ; R4.1 22.369,23.241 ; U1.17 34.643,20.526 34.524,20.644 34.524,22.454 33.356,23.622 26.594,23.622 26.213,23.241 22.369,23.241 ; 20.543,23.241 22.369,23.241
C3_IO10: R12.1 U2.10 | length 10.4
  Top Layer w0.2: v1(27.102,21.844) R12.1
  Top Layer w0.5: U2.10 19.142,20.452 v1(19.149,20.445)
  Bottom Layer w0.18: v1(19.149,20.445) 19.759,20.445 20.777,21.463 22.962,21.463 23.343,21.844 v1(27.102,21.844)
C3_IO18: H2.6 U2.13 | length 10.8
  Top Layer w0.5: U2.13 14.642,20.452 v1(14.649,20.445)
  Bottom Layer w0.18: v1(14.649,20.445) 15.111,20.445 17.628,22.962 18.898,22.962 19.456,23.52 21.198,23.52 H2.6
C3_IO19: H2.7 U2.14 | length 16
  Top Layer w0.5: U2.14 13.142,20.452 v1(13.149,20.445)
  Bottom Layer w0.18: v1(13.149,20.445) 13.149,19.82 13.458,19.511 14.859,19.511 17.801,22.454 18.929,22.454 19.615,23.139 21.666,23.139 22.149,23.622 23.84,23.622 H2.7
C3_RX: H2.2 U2.11 | length 7.1
  Top Layer w0.189: H2.2@12.141,24.765 13.564,23.343 16.51,23.343 17.292,22.561 17.292,22.065 U2.11
C3_TX: H2.1 U2.12 | length 8.2
  Top Layer w0.189: H2.1 11.526,22.936 15.875,22.936 16.142,22.669 U2.12
ESP_EN: C8.1 H1.1 H1.4 R1.1 U2.2 | length 41
  Top Layer w0.2: C8.1 R1.1 v1(22.936,17.526)
  Top Layer w0.5: v1(8.635,5.486) 8.642,5.479 U2.2
  Bottom Layer w0.18: H1.1 9.72,2.845 ; H1.4 15.763,2.845 9.72,2.845 ; v1(22.936,17.526) 21.559,17.526 20.263,16.231 9.565,16.231 8.635,15.301 v1(8.635,5.486) 8.635,3.93 9.72,2.845
ETH_CLK: R11.2 U1.18 | length 8.6
  Top Layer w0.18: R11.2 28.795,23.063 29.54,23.063 33.299,23.063 34.143,22.22 U1.18
ETH_MISO: R15.2 U1.20 | length 7.9
  Top Layer w0.18: R15.2 29.21,20.701 30.785,22.276 32.918,22.276 33.274,21.92 33.274,20.752 33.143,20.621 U1.20
ETH_MOSI: R12.2 U1.19 | length 8.2
  Top Layer w0.18: R12.2 29.363,21.844 30.175,22.657 33.096,22.657 33.757,21.996 33.757,20.585 33.643,20.471 U1.19
ETH_PWR: C3.1 C4.1 C5.1 FP1.1 J1.11 J1.13 R5.1 U1.15 U1.21 U1.29 | length 9
  Top Layer w0.18: U1.15 35.986,18.268 36.238,18.016 36.594,18.016 R5.1
  Top Layer w0.2: 29.44,16.991 29.663,16.768 U1.29
  Top Layer w0.254: FP1.1 26.839,19.285 27.1,19.025 v1(27.102,19.025) 27.423,18.703 28.143,18.703 C4.1 28.617,18.652 28.976,18.292 28.976,17.455 29.44,16.991 ; R5.1 36.703,18.016 C3.1 v1(37.321,19.033)
  other v1: 32.655,21.675
ETH_RXN: J1.2 R14.2 U1.4 | length 14.6
  Top Layer w0.18: U1.4 32.643,13.153 33.045,12.751 34.417,12.751 35.255,11.913 35.255,10.109 35.927,9.438 R14.2 38.695,9.438 39.613,8.52 J1.2
ETH_RXP: J1.1 R13.1 U1.3 | length 15.3
  Top Layer w0.18: U1.3 32.143,13.094 32.868,12.37 34.239,12.37 34.874,11.735 34.874,9.766 35.814,8.826 35.814,6.604 36.106,6.312 R13.1 38.037,6.312 38.975,7.25 J1.1
ETH_STA_ATC: R19.1 U1.26 | length 10.8
  Top Layer w0.2: v1(29.616,19.583) 29.616,18.567 29.916,18.268 U1.26
  Top Layer w0.5: v1(35.081,22.352) R19.1
  Bottom Layer w0.2: v1(29.616,19.583) 29.616,22.047 29.972,22.403 31.953,22.403 32.131,22.581 33.122,22.581 33.35,22.352 v1(35.081,22.352)
ETH_STA_LINK: H3.2 R18.1 U1.25 | length 31
  Top Layer w0.2: v1(30.328,19.583) 30.328,18.798 30.358,18.768 U1.25
  Top Layer w0.5: v1(35.064,21.209) R18.1
  Bottom Layer w0.18: v1(30.328,19.583) 30.328,19.619 30.099,19.847 30.099,21.311 30.353,21.565 31.623,21.565 32.182,21.006 33.071,21.006 33.274,21.209 v1(35.064,21.209) 35.497,21.209 36.474,20.232 36.474,19.068 38.456,17.087 38.456,3.962 40.172,2.246 40.172,1.296 H3.2
ETH_TXN: J1.6 R17.2 U1.7 | length 9.5
  Top Layer w0.18: U1.7 34.143,13.898 34.452,13.589 R17.2 42.814,13.589 J1.6
ETH_TXP: J1.5 R16.1 U1.6 | length 10.3
  Top Layer w0.18: U1.6 33.643,13.779 34.265,13.157 34.569,13.157 35.662,12.065 35.662,10.82 36.019,10.463 R16.1 38.378,10.463 40.245,12.33 J1.5
EXT_IO0: H4.1
EXT_IO1: H2.11
EXT_IO2: H2.10
EXT_IO3: H2.9
EXT_IO4: H2.8
GND: C1.2 C2.2 C3.2 C4.2 C5.2 C6.2 C7.2 C8.2 C9.1 C10.1 C11.2 C12.2 C16.2 C17.2 C18.2 C19.2 H1.2 H1.9 H1.11 H2.4 H4.2 LD2.2 R2.1 R3.2 R21.1 U1.5 U1.10 U1.22 U1.23 U1.28 U1.32 U1.33 U2.9 U2.19 U2.20 U2.21 U2.22 U2.23 U2.24 U2.25 U2.26 U2.27 U2.28 U2.29 U2.30 U2.31 U2.32 U2.33 U2.34 U2.35 U2.36 U2.37 U2.38 U2.39 U3.2 X1.2 X1.4 | length 12.8
  Top Layer w0.18: U1.5 33.143,13.578 33.299,13.422 v1(33.299,13.335) ; C1.2 v1(37.372,15.748)
  Top Layer w0.2: v1(20.752,18.669) C8.2 ; LD2.2 21.501,15.977 v1(22.225,15.977) ; U1.28 32.643,17.268 v1(32.893,17.018) U1.33@34.143,15.768 ; v1@30.785,20.726 30.886,20.828 C5.2 ; v1(34.214,15.697) 34.285,15.768 U1.10
  Top Layer w0.4: C17.2 v1@23.622,11.303 ; v1@25.692,12.154 C16.2 ; C6.2@28.296,12.827 28.353,12.77 28.353,12.097 v1(28.346,12.09)
  Top Layer w0.5: v1(19.135,5.486) 19.142,5.479 U2.9
  other v1: 1.196,2.865 2.166,2.865 3.136,2.865 4.106,2.865 5.076,2.865 6.045,2.865 0.711,3.35 1.681,3.35 2.651,3.35 3.621,3.35 4.591,3.35 5.561,3.35 6.553,5.89 7.038,6.375 6.553,6.859 7.038,7.344 6.553,7.829 7.038,8.314 6.553,8.799 33.198,8.814 33.757,8.814 7.038,9.284 6.553,9.769 7.038,10.254 6.553,10.739 7.038,11.224 23.628,11.297 6.553,11.709 25.686,12.147 7.038,12.194 30.162,12.446 6.553,12.679 7.038,13.164 6.553,13.649 7.038,14.133 6.553,14.618 7.038,15.103 6.553,15.588 31.572,15.697 32.893,15.697 7.038,16.073 6.553,16.558 31.572,17.018 34.214,17.018 7.038,17.043 6.553,17.528 7.038,18.013 31.572,18.339 32.893,18.339 34.214,18.339 25.4,18.466 6.553,18.498 7.038,18.983 6.553,19.468 27.102,19.812 35.331,19.982 25.425,20.015 23.952,20.041 30.785,20.828 0.711,22.581 1.681,22.581 2.651,22.581 3.621,22.581 4.591,22.581 5.561,22.581 1.196,23.066 2.166,23.066 3.136,23.066 4.106,23.066 5.076,23.066 6.045,23.066
NetC11_1: C11.1 R13.2 R14.1 | length 7
  Top Layer w0.18: C11.1 33.586,11.184 34.205,11.184 v1(34.214,11.176) ; R13.2 v1(36.703,7.875) R14.1
  Bottom Layer w0.18: v1(34.214,11.176) 35.54,11.176 36.703,10.013 v1(36.703,7.875)
NetC12_1: C12.1 R16.2 R17.1 | length 7.5
  Top Layer w0.18: v1(31.272,11.572) 31.891,11.572 C12.1 ; R16.2 v1(36.703,12.026) R17.1
  Bottom Layer w0.18: v1(31.272,11.572) 33.289,11.572 33.743,12.026 v1(36.703,12.026)
NetC13_1: C13.1 J1.S1 | length 4.6
  Top Layer w0.5: J1.S1 46.39,4.957 46.39,3.674 47.714,2.349 C13.1
NetC14_1: C14.1 J1.S2 | length 6.6
  Top Layer w0.5: J1.S2 48.142,20.71 49.314,21.882 C14.1
NetC15_2: C15.2 R20.1 R21.2 U3.5 | length 12.1
  Top Layer w0.18: C15.2 R21.2 v1(33.782,2.718) ; U3.5 v1(34.656,8.524)
  Bottom Layer w0.18: v1(33.782,2.718) 35.321,2.718 35.856,3.253 35.856,8.094 35.427,8.524 v1(34.656,8.524)
NetJ1_12: J1.12 R18.2 | length 25.8
  Top Layer w0.5: R18.2 v1(37.292,21.209)
  Bottom Layer w0.2: v1(37.292,21.209) 43.078,21.209 53.746,10.542 J1.12
NetJ1_14: J1.14 R19.2 | length 19.7
  Top Layer w0.5: R19.2 v1(37.287,22.352)
  Bottom Layer w0.2: v1(37.287,22.352) 41.233,22.352 42.249,23.368 50.623,23.368 51.995,21.996 52.832,21.996 53.746,21.083 J1.14
NetL1_1: L1.1 U3.3
NetLD1_2: LD1.2 R6.1 | length 1.3
  Top Layer w0.2: R6.1 LD1.2
NetLD2_1: LD2.1 R8.2 | length 1.5
  Top Layer w0.2: R8.2 21.343,14.244 LD2.1
NetLD3_2: LD3.2 R10.1 | length 1.3
  Top Layer w0.2: R10.1 LD3.2
NetR3_1: R3.1 U1.1 | length 12
  Top Layer w0.2: R3.1 v1(26.01,21.26) ; v1@30.759,14.402 31.113,14.402 31.143,14.432 U1.1
  Bottom Layer w0.18: 27.581,21.26 28.016,20.824 28.016,20.808
  Bottom Layer w0.2: v1(26.01,21.26) 27.581,21.26 ; 28.016,20.808 28.016,14.961 28.575,14.402 v1(30.632,14.402)
NetR5_2: R5.2 U1.9 | length 4.8
  Top Layer w0.18: U1.9@35.544,15.268 35.584,15.228 35.584,14.81 v1(35.585,14.808) ; R5.2 v1(37.372,16.857)
  Bottom Layer w0.18: v1(35.585,14.808) 35.585,16.586 35.856,16.857 v1(37.372,16.857)
POE_PW_GND: C13.2 C14.2 H4.4 J1.10
POE_PW_VCC: H4.3 J1.9 | length 8.3
  Top Layer w0.5: J1.9 40.286,19.549 42.74,22.003 H4.3
XI: C10.2 U1.31 X1.3 | length 4.2
  Top Layer w0.18: X1.3@26.666,15.137 X1.3@26.666,15.152
  Top Layer w0.2: X1.3 26.666,14.908 27.166,15.408 C10.2 29.251,15.408 29.611,15.768 U1.31
XO: C9.2 U1.30 X1.1 | length 6.4
  Top Layer w0.2: X1.1 24.916,16.983 25.416,16.483 25.897,16.002 27.658,16.002 27.98,16.324 27.98,16.359 28.155,16.534 C9.2 29.237,16.534 29.503,16.268 U1.30
pads on no net: H3.3 H3.4 J1. U1.11 U1.12 U1.13 U1.14 U1.16

## Polygon pours and split planes (outlines as drawn)
GND on Top Layer "NONET_L01_P-001" (solid, pour order 26): 28.342,20.803 28.504,20.641 28.504,19.335 28.423,19.253 27.356,19.253 26.721,19.888 23.698,19.888 23.478,20.108 23.478,22.564 23.617,22.703 24.667,22.703 24.667,20.96 24.825,20.803
GND on Top Layer "NONET_L01_P-001" (solid, pour order 25): 29.21,18.92 23.571,18.92 23.571,13.691 29.21,13.691
GND on Top Layer "NONET_L01_P-001" (solid, remove dead copper, pour order 24): 9.398,5.486 14.509,5.486 14.509,0 0,0 0,3.965 6.042,3.965 6.042,21.965 0,21.965 0,26 9.398,26
GND on Top Layer "NONET_L01_P-001" (solid, pour order 21): 38.979,26 38.979,22.24 37.097,20.358 35.395,20.358 35.331,20.295 35.331,19.669 35.391,19.609 38.989,19.609 41.436,22.056 41.436,26
GND on Top Layer "NONET_L01_P-001" (solid, pour order 19): 32.273,20.102 32.08,20.295 31.901,20.295 31.678,20.518 31.678,21.138 31.128,21.138 31.128,20.358 31.513,19.973 31.513,19.139 32.273,19.139
ETH_PWR on Top Layer "NONET_L01_P-001" (solid, pour order 17): 28.976,18.292 28.976,19.477 30.861,21.361 31.776,21.361 32,21.138 32,20.518 32.275,20.518 32.513,20.28 32.513,19.468 32.773,19.468 32.773,21.558 32.537,21.793 30.302,21.793 28.702,20.193 28.702,19.125 28.504,18.927 27.884,18.927 27.884,18.377 28.892,18.377
1.8V on Top Layer "NONET_L01_P-001" (solid, pour order 15): 34.524,14.605 34.561,14.568 34.773,14.568 34.773,14.478 35.001,14.249 35.408,14.249 36.144,14.986 36.157,14.973 37.013,14.973 37.013,14.174 36.631,13.792 34.798,13.792 34.513,14.077 34.513,14.568
+3V3 on Top Layer "NONET_L01_P-001" (solid, pour order 14): 23.666,13.252 22.929,12.515 20.428,12.515 20.271,12.673 20.271,16.766 20.581,17.076 21.444,17.076 21.594,17.226 21.594,20.112 20.164,20.112 19.964,19.912 19.964,12.16 20.271,11.853 24.681,11.853 24.681,12.238
+3V3 on Top Layer "NONET_L01_P-001" (solid, pour order 11): 29.108,12.04 29.159,11.989 29.464,11.989 29.54,11.913 29.54,11.532 29.439,11.43 29.185,11.43 29.108,11.354 29.108,9.373 28.829,9.093 25.527,9.093 25.222,9.398 25.222,10.693 23.851,12.065 23.647,12.065 23.597,12.116 23.597,13.411 23.673,13.487 28.88,13.487 29.108,13.259
POE_PW_GND on Top Layer "NONET_L01_P-001" (solid, pour order 9): 44.129,26.012 44.129,20.361 43.707,19.939 41.783,19.939 41.631,19.787 41.631,17.526 41.808,17.348 43.688,17.348 44.145,16.891 44.145,0.022 44.17,-0.002 55,0 55,26
GND on Top Layer "NONET_L01_P-001" (solid, pour order 7): 30.443,15.398 29.851,15.398 29.718,15.265 29.718,12.624 29.896,12.446 30.429,12.446 30.531,12.548 30.531,13.64 30.429,13.741 30.201,13.741 30.099,13.843 30.099,15.036
1.8V on Top Layer "NONET_L01_P-001" (solid, pour order 5): 31.513,14.568 31.513,13.885 31.369,13.741 30.946,13.741 30.886,13.681 30.886,12.522 30.963,12.446 31.725,12.446 31.773,12.494 31.773,14.568
NetL1_1 on Top Layer "NONET_L01_P-001" (solid, pour order 3): 32.146,6.33 29.52,6.33 28.854,5.664 25.349,5.664 25.222,5.537 25.222,3.048 25.349,2.921 29.489,2.921 30.277,3.708 30.277,5.182 30.835,5.74 32.146,5.74
GND on Top Layer "NONET_L01_P-001" (solid, pour order 1): 34.37,2.921 33.807,2.358 33.807,0.239 34.046,0 36.398,0 36.398,2.489 36.54,2.631 37.124,2.631 37.124,4.47 37.155,4.501 34.881,4.501 34.557,4.825 34.557,5.626 34.37,5.813 34.37,10.232 34.112,10.49 31.445,10.49 31.14,10.185 31.14,8.997 31.299,8.839 32.664,8.839 33.096,8.407 33.096,7.518 32.858,7.28 31.688,7.28 31.688,6.69 32.705,6.69 32.969,6.426 32.969,5.715 33.482,5.202 33.482,4.064 34.087,4.064 34.37,3.781
+5 on Top Layer "NONET_L01_P-001" (solid, pour order 0): 34.531,6.782 34.646,6.896 34.646,7.112 34.747,7.214 35.179,7.214 35.369,7.023 35.369,6.566 35.585,6.35 35.585,5.74 35.763,5.563 38.024,5.563 38.583,5.004 38.583,2.19 38.41,2.018 38.41,0.518 36.91,0.518 36.91,2.417 37.338,2.845 37.338,4.318 37.155,4.501 34.881,4.501 34.671,4.711 34.671,5.512 34.442,5.74 34.011,5.74 33.782,5.969 33.782,6.655 33.909,6.782